# EAGLE board Diode as a voltage regulator (EAGLE 9.6.2)
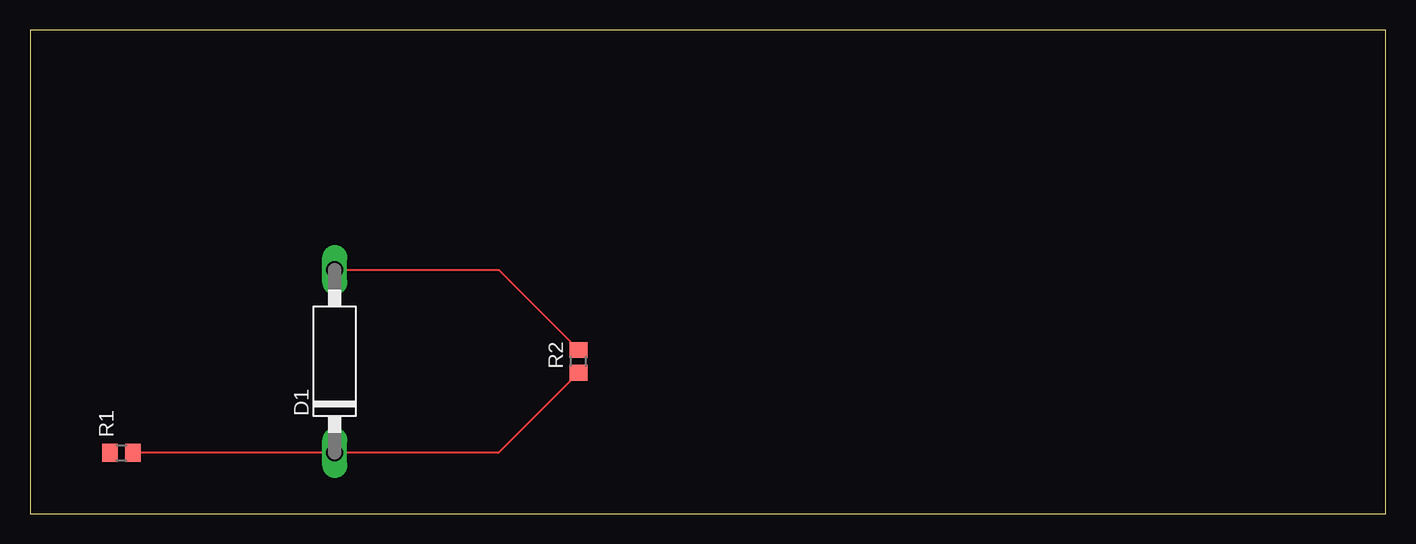
[diagram p0: board, top side]

Size 113.01 x 40.31 mm. Coordinates in mm from the lower left corner, seen from the top.
Outline: 0,0 113.01,0 113.01,40.31 0,40.31 0,0
Copper layers (1*16): Top 0.035mm / dielectric 1.5mm / Bottom 0.035mm
Design rules "default": minimum track width 6mil, minimum drill 0.35mm, track to track 6mil, track to pad 6mil, pad to pad 6mil, via to via 6mil, smd to smd 6mil, copper to edge 40mil, drill to drill 6mil, minimum pad ring 10mil, minimum via ring 8mil, stop-mask expansion 4mil, vias tented up to drill 0mil, thermal gap 10mil

## Footprints (pad centres in the part's own frame; a part is rotated, then mirrored left to right if it is on the bottom)
C1702-15 = drill 1.397 long: A 7.62,0; C -7.62,0
R0805 = smd 1.3 x 1.5: 1 -0.95,0; 2 0.95,0

## Placement (x,y rotation side)
D1  1N5333  [C1702-15]  25.4,12.7 90 top
R1  [R0805]  7.62,5.08 0 top
R2  [R0805]  45.72,12.7 90 top

## Library data of the parts
D1 = diode
R1 R2 = rcl; SPICEPREFIX: R

## Nets
N$1: D1.C R1.2 R2.1
N$2: D1.A R2.2
N$4: R1.1

## Tracks (layer width: path | path; a pad name or v marks a point on that pad's centre or on a via)
N$1
  Top 0.152: R2.1 39.05,5.08 D1.C R1.2
N$2
  Top 0.152: D1.A 39.05,20.32 R2.2